# Altium PCB OSSI-1 OBC.PcbDoc (part 1 of 2)
Units mil, origin at the board's own origin, x right, y up, seen from the top; angles counter-clockwise.
Board outline 3701 x 3701 mil, 2 copper layers (Top, Bottom), stack 61.811 mil thick; 158 components, 161 nets, 616 pads, 177 vias.
Unrouted connection lines stored in the file: 1.
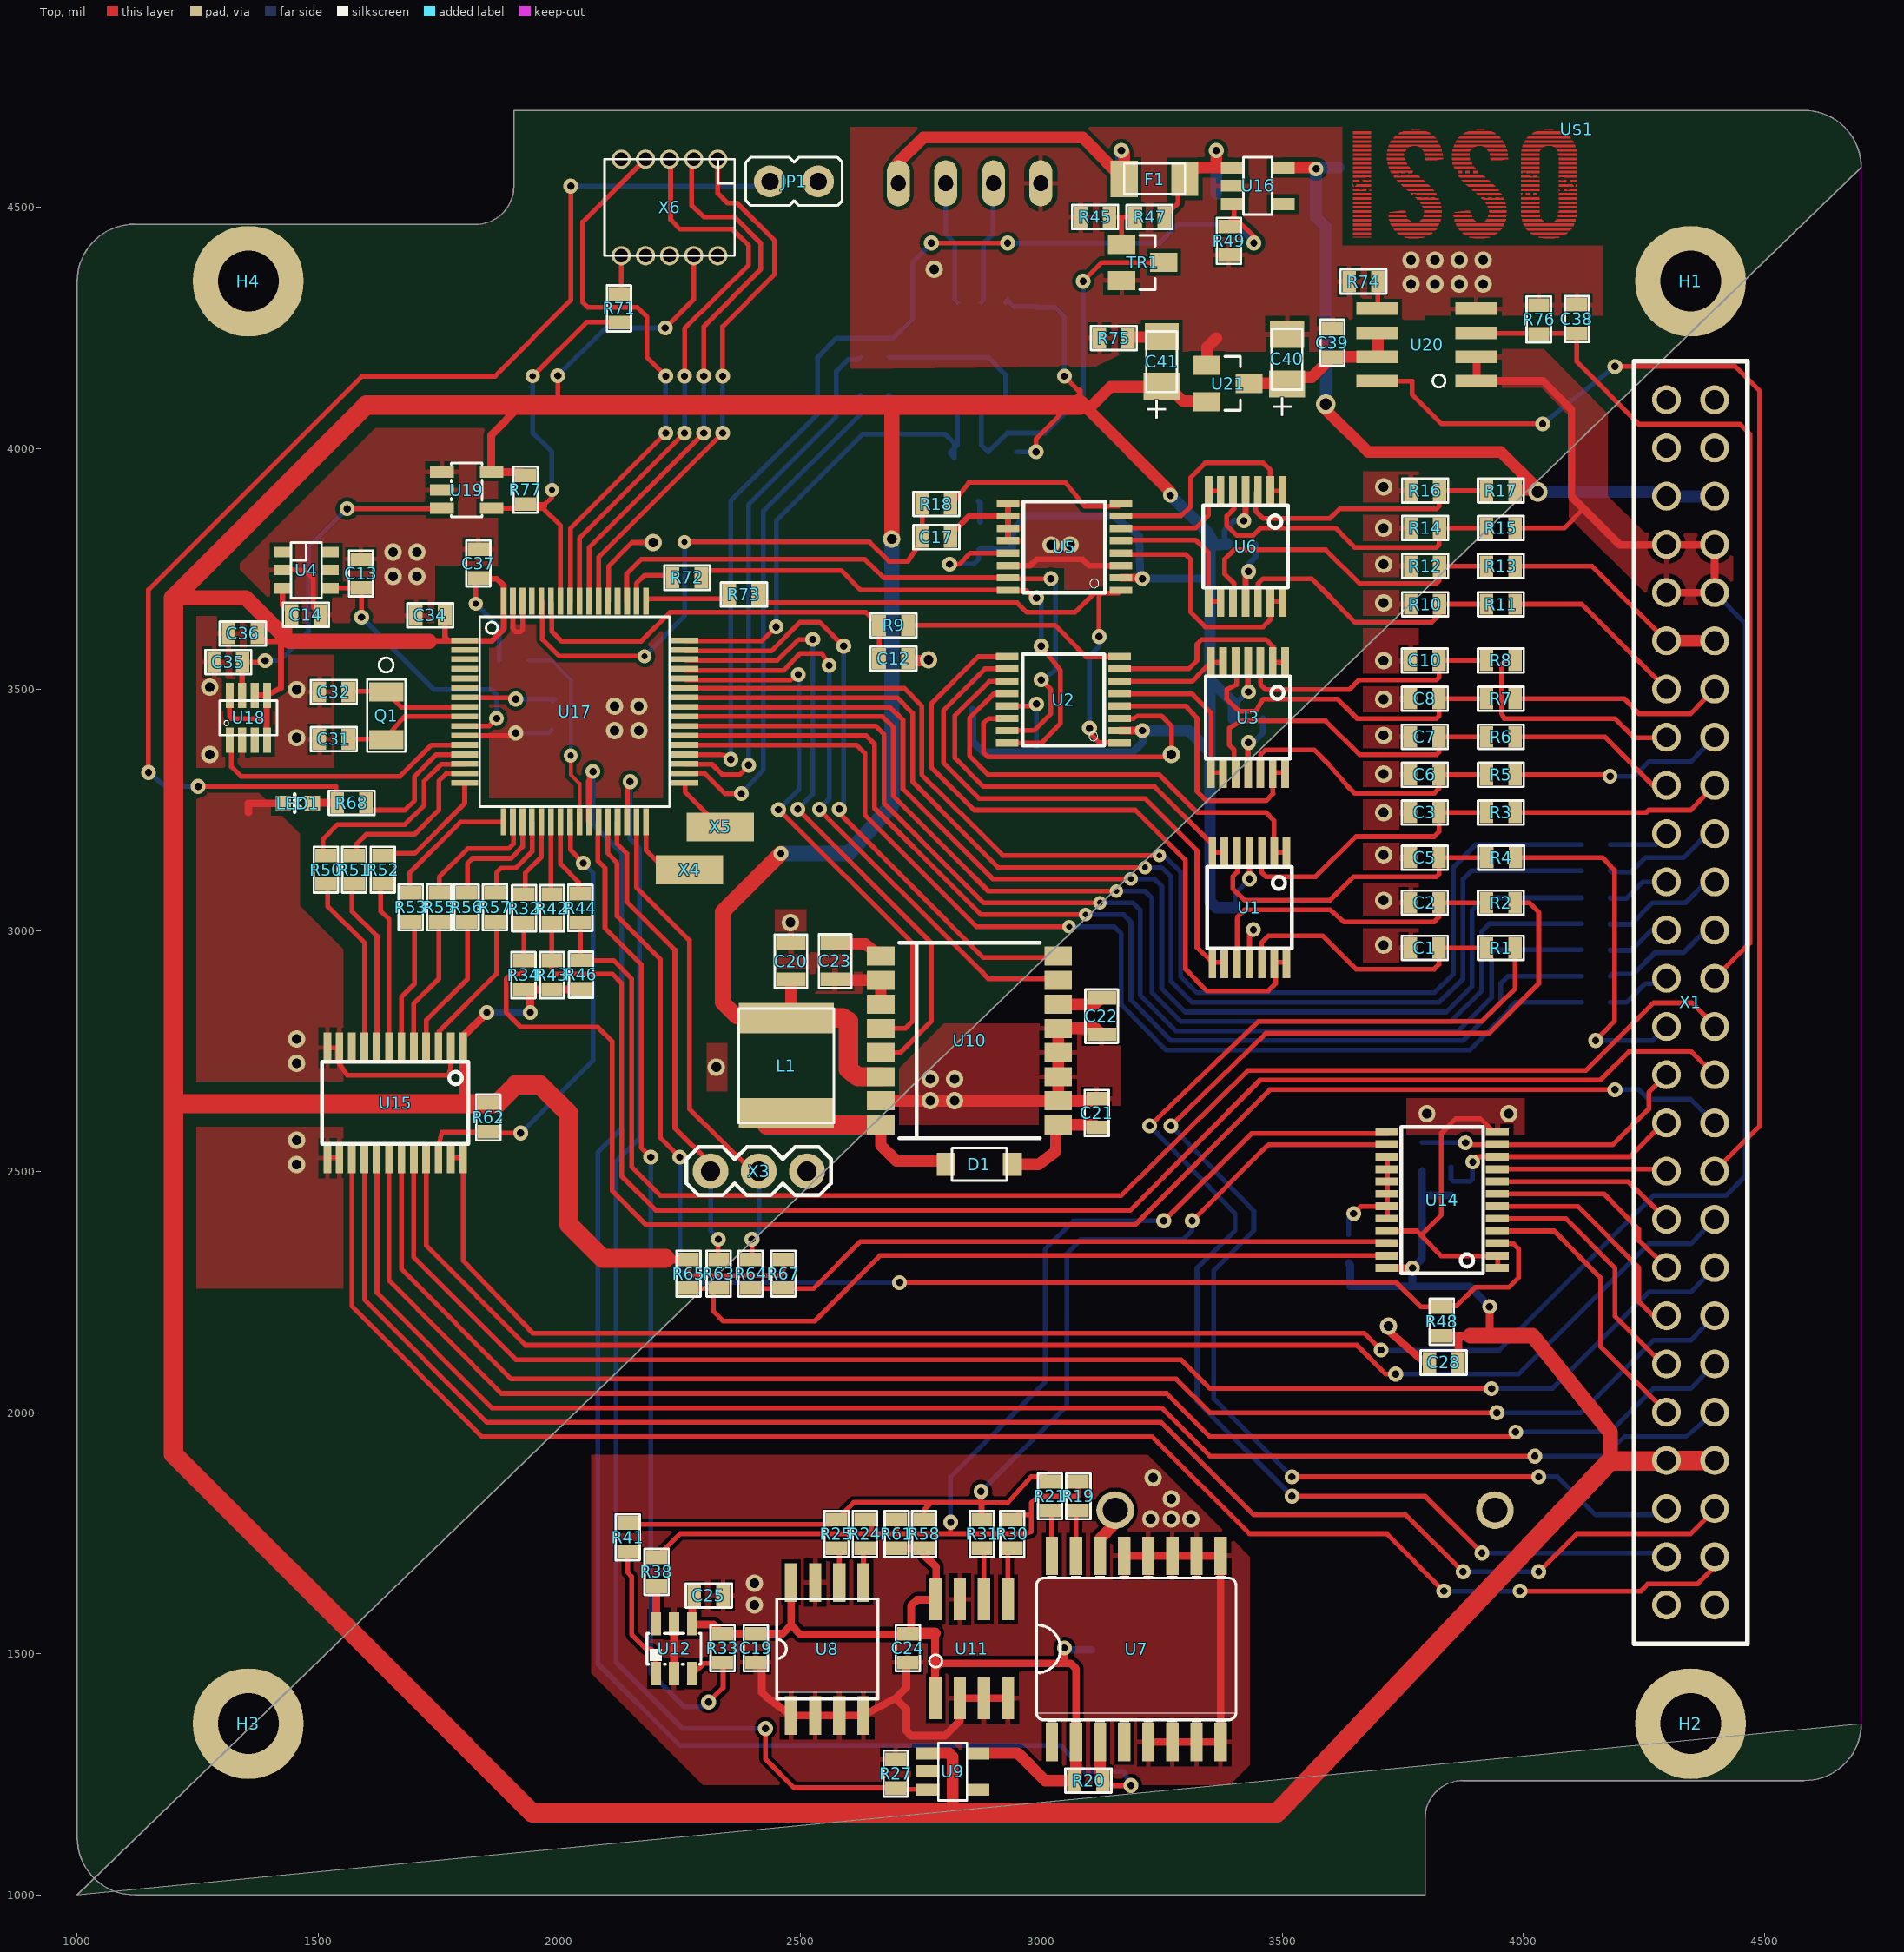
[diagram p0: Top view]
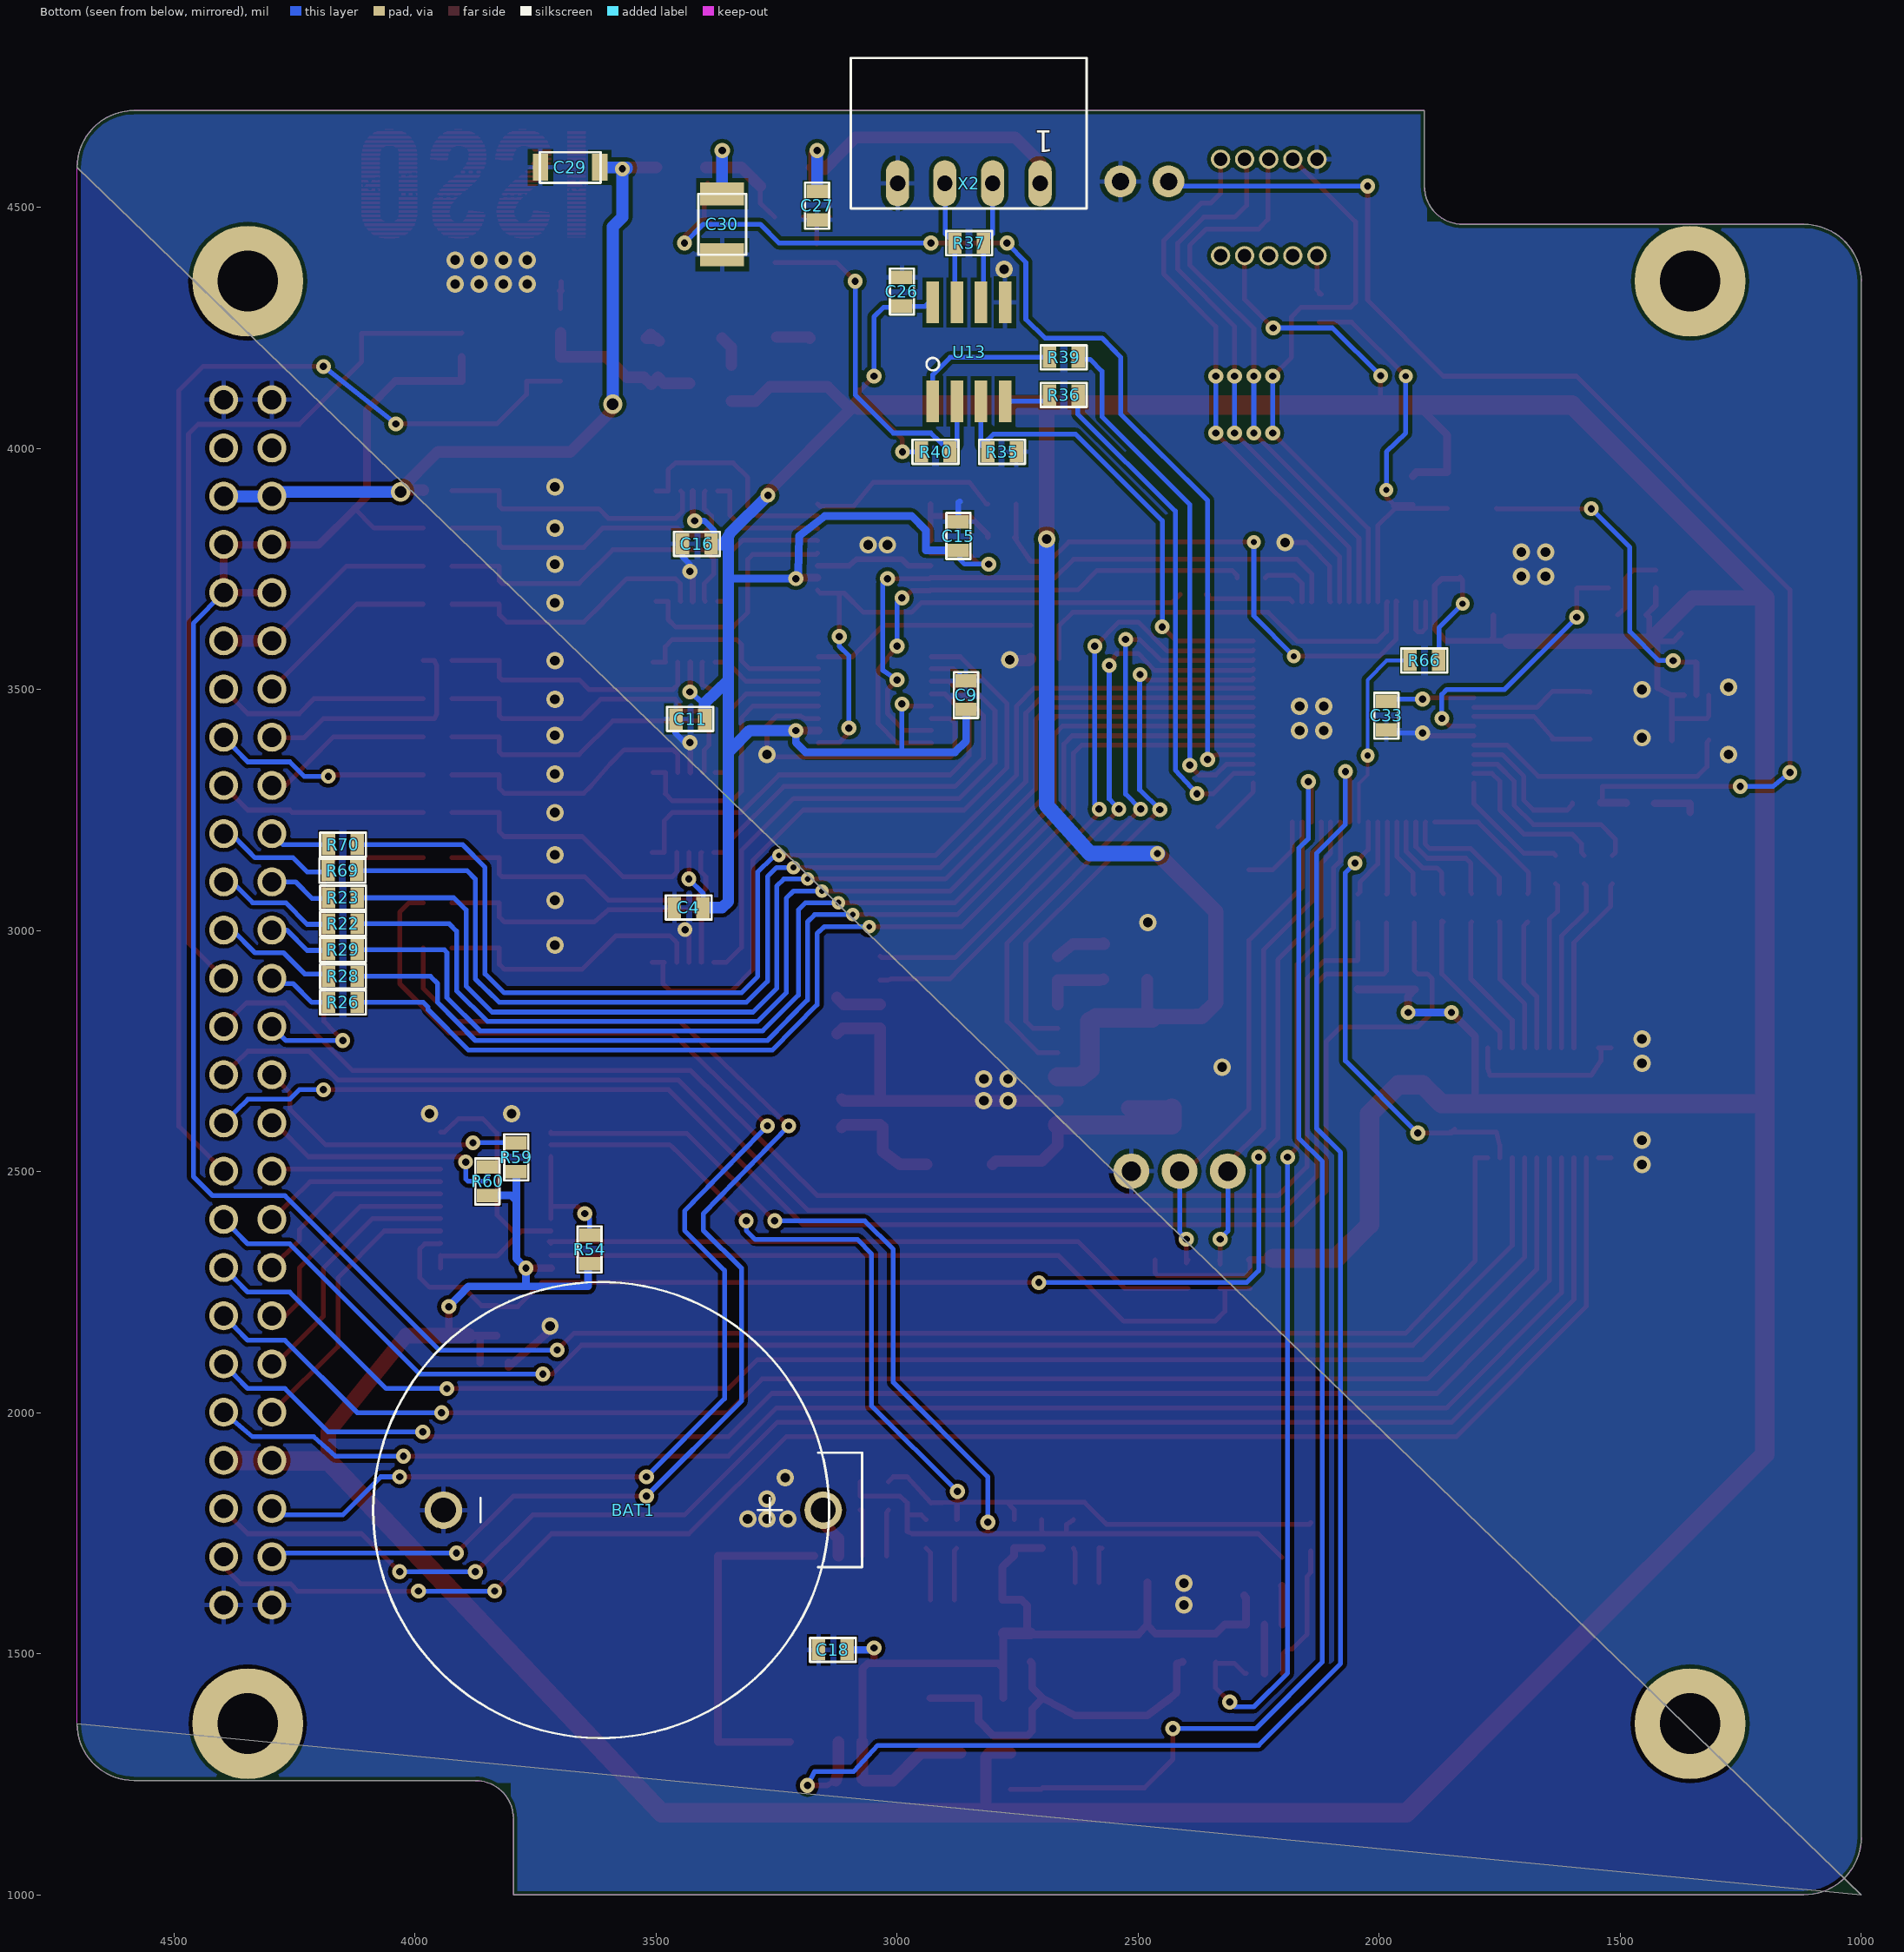
[diagram p1: Bottom view, seen from below]

## Layer stack, top to bottom
Top Solder: solder mask 0.4, Solder Resist, Dk 3.5
Top: signal copper 1.378
Dielectric 1: core 59.0551, FR-4, Dk 4.8
Bottom: signal copper 1.378
Bottom Solder: solder mask 0.4, Solder Resist, Dk 3.5

## Board outline
4701,1355 cw(c4583,1355) 4583,1237 3875,1237 ccw(c3875,1158) 3796,1158 3796,1000 1119,1000 cw(c1119,1119) 1000,1119 1000,4347 cw(c1118.5,4346.5) 1119,4465 1827,4465 ccw(c1827,4544) 1906,4544 1906,4701 4583,4701 cw(c4583,4583) 4701,4583 1000,1000

## Design rules (kind name [scope] priority, off if disabled: settings)
Clearance mdViaVia [IsVia vs IsVia] p1: gap=8
Clearance mdPadVia [IsPad vs IsVia] p2: gap=8
Clearance mdPadPad [IsPad vs IsPad] p3: gap=4
Clearance mdWireVia [(InLayerClass('Signal Layers') AND IsTrack) vs IsVia] p4: gap=8
Clearance mdWirePad [(InLayerClass('Signal Layers') AND IsTrack) vs IsPad] p5: gap=8
Clearance mdWireWire [(InLayerClass('Signal Layers') AND IsTrack) vs (InLayerClass('Signal Layers') AND IsTrack)] p6: gap=8
Clearance [All] p7: gap=8
HoleSize [All] p1: absolutevalues=TRUE maxlimit=100000 minlimit=10 maxpercent=80.000 minpercent=20.000
HoleToHoleClearance [All] p1: gap=8 allowstackedmicrovias=TRUE
PolygonConnect ThermalVias [IsVia] p1: connectstyle=Direct reliefconductorwidth=10 reliefentries=4 polygonreliefangle="90 Angle" airgapwidth=10
PolygonConnect [All] p2: connectstyle=Relief reliefconductorwidth=10 reliefentries=4 polygonreliefangle="90 Angle" airgapwidth=10
RoutingVias [All] p1: holewidth=28 width=50 viastyle="Through Hole" minholewidth=28 minwidth=50 maxholewidth=28 maxwidth=50
SilkToSilkClearance [All] p1 off: silktosilkclearance=10
SilkToSolderMaskClearance [IsPad] p1 off: minsilkscreentomaskgap=10 clearancetoexposedcopper=TRUE
SolderMaskExpansion [All] p1: expansion=4
Width [All] p1: maxlimit=100000 minlimit=8 preferedwidth=10
26 further rules are at their usual default settings.

## Components (designator, comment, footprint, x,y, rotation, side; value= is the part's Value field where it differs from the comment)
BAT1 "" BH32T-C-G 3614,1798 r90 bottom
C1 "100nF" C0603(1608) 3796,2964 r180 top
C2 "100nF" C0603(1608) 3796,3058 r180 top
C3 "100nF" C0603(1608) 3796,3245 r180 top
C4 "100nF" C0603(1608) 3432,3048 r0 bottom
C5 "100nF" C0603(1608) 3796,3151 r180 top
C6 "100nF" C0603(1608) 3796,3323 r180 top
C7 "100nF" C0603(1608) 3796,3402 r180 top
C8 "100nF" C0603(1608) 3796,3481 r180 top
C9 "100nF" C0603(1608) 2857,3488 r90 bottom
C10 "100nF" C0603(1608) 3796,3560 r180 top
C11 "100nF" C0603(1608) 3429,3439 r0 bottom
C12 "100nF" C0603(1608) 2693,3564 r0 top
C13 "100nF" C0603(1608) 1589,3741 r270 top
C14 "100nF" C0603(1608) 1475,3655 r180 top
C15 "100nF" C0603(1608) 2873,3818 r90 bottom
C16 "100nF" C0603(1608) 3415,3802 r0 bottom
C17 "100nF" C0603(1608) 2782,3816 r0 top
C18 "100nF" C0603(1608) 3133,1508 r0 bottom
C19 "100nF" C0603(1608) 2408,1512 r270 top
C20 "1uF 0805" C0805(2012) 2481,2936 r90 top
C21 "100nF" C0603(1608) 3115,2622 r270 top
C22 "1uF 0805" C0805(2012) 3125,2823 r270 top
C23 "1uF 0805" C0805(2012) 2572,2937 r270 top
C24 "100nF" C0603(1608) 2723,1512 r270 top
C25 "100nF" C0603(1608) 2310,1621 r0 top
C26 "100nF" C0603(1608) 2990,4325 r90 bottom
C27 "100nF" C0603(1608) 3166,4504 r270 bottom
C28 "100nF" C0603(1608) 3835,2104 r180 top
C29 "4.7uF, 1210" C1206-GCM31 3678,4583 r0 bottom
C30 "10uF,3225" C1210-GCM32 3363,4465 r270 bottom
C31 "12.5pF" C0603(1608) 1533,3397 r180 top
C32 "12.5pF" C0603(1608) 1533,3495 r180 top
C33 "100nF" C0603(1608) 1985,3446 r270 bottom
C34 "100nF" C0603(1608) 1733,3654 r180 top
C35 "100nF" C0603(1608) 1314,3557 r180 top
C36 "100nF" C0603(1608) 1344,3616 r180 top
C37 "100nF" C0603(1608) 1832,3761 r90 top
C38 "1uF" C0603(1608) 4111,4268 r90 top
C39 "100nF" C0603(1608) 3604,4219 r90 top
C40 "10uF, LDO Tantal 16V" C1206(3216)-A 3510,4185 r90 top
C41 "10uF, LDO Tantal 16V" C1206(3216)-A 3250,4180 r90 top
D1 "MMSD4148T1G" SOD-123 2871,2515 r0 top
F1 "POLYSWITCH" NANOSMDC150FCT 3235,4559 r0 top
H1 "" 3.2-PAD-ROUND 4347,4347 r0 top
H2 "" 3.2-PAD-ROUND 4347,1355 r0 top
H3 "" 3.2-PAD-ROUND 1355,1355 r0 top
H4 "" 3.2-PAD-ROUND 1355,4347 r0 top
JP1 "" JP1 2487,4554 r90 top
L1 "470uH, 240mA" L(2220) 2471,2720 r270 top
LED1 "" LED-0603 1458,3264 r90 top
Q1 "NX-3215" NX-3215 1641,3446 r270 top
R1 "10k" R0603(1608) 3953,2964 r0 top
R2 "10k" R0603(1608) 3953,3058 r0 top
R3 "10k" R0603(1608) 3953,3245 r0 top
R4 "10k" R0603(1608) 3954,3151 r0 top
R5 "10k" R0603(1608) 3953,3323 r0 top
R6 "10k" R0603(1608) 3953,3402 r0 top
R7 "10k" R0603(1608) 3953,3481 r0 top
R8 "10k" R0603(1608) 3953,3560 r0 top
R9 "10k" R0603(1608) 2693,3633 r0 top
R10 "100k" R0603(1608) 3796,3677 r0 top
R11 "100k" R0603(1608) 3953,3677 r0 top
R12 "100k" R0603(1608) 3796,3756 r0 top
R13 "100k" R0603(1608) 3953,3756 r0 top
R14 "100k" R0603(1608) 3796,3835 r0 top
R15 "100k" R0603(1608) 3953,3835 r0 top
R16 "100k" R0603(1608) 3796,3913 r0 top
R17 "100k" R0603(1608) 3953,3913 r0 top
R18 "10k" R0603(1608) 2782,3885 r0 top
R19 "250" R0603(1608) 3077,1827 r270 top
R20 "470k" R0603(1608) 3098,1237 r180 top
R21 "250" R0603(1608) 3018,1827 r270 top
R22 "1.5k" R0603(1608) 4150,3014 r180 bottom
R23 "1.5k" R0603(1608) 4150,3068 r180 bottom
R24 "250" R0603(1608) 2634,1749 r270 top
R25 "250" R0603(1608) 2575,1749 r270 top
R26 "1.5k" R0603(1608) 4150,2851 r180 bottom
R27 "100k" R0603(1608) 2698,1251 r90 top
R28 "1.5k" R0603(1608) 4150,2905 r180 bottom
R29 "1.5k" R0603(1608) 4150,2960 r180 bottom
R30 "250" R0603(1608) 2940,1749 r270 top
R31 "250" R0603(1608) 2877,1749 r270 top
R32 "4.7k" R0603(1608) 1927,3046 r90 top
R33 "470k" R0603(1608) 2339,1512 r270 top
R34 "470k" R0603(1608) 1926,2908 r270 top
R35 "33k" R0603(1608) 2782,3993 r0 bottom
R36 "4.7k" R0603(1608) 2654,4111 r0 bottom
R37 "120, DNP" R0603(1608) 2851,4426 r180 bottom
R38 "250" R0603(1608) 2202,1670 r270 top
R39 "4.7k" R0603(1608) 2654,4189 r0 bottom
R40 "33k" R0603(1608) 2920,3993 r0 bottom
R41 "250" R0603(1608) 2142,1742 r270 top
R42 "4.7k" R0603(1608) 1985,3046 r90 top
R43 "470k" R0603(1608) 1985,2908 r270 top
R44 "4.7k" R0603(1608) 2044,3047 r90 top
R45 "100k" R0603(1608) 3112,4480 r180 top
R46 "470k" R0603(1608) 2045,2909 r270 top
R47 "100k" R0603(1608) 3225,4480 r180 top
R48 "100k" R0603(1608) 3831,2189 r270 top
R49 "100k" R0603(1608) 3389,4431 r270 top
R50 "1.5k" R0603(1608) 1516,3126 r90 top
R51 "1.5k" R0603(1608) 1575,3126 r90 top
R52 "1.5k" R0603(1608) 1634,3126 r90 top
R53 "1.5k" R0603(1608) 1692,3048 r90 top
R54 "10k" R0603(1608) 3638,2339 r270 bottom
R55 "1.5k" R0603(1608) 1751,3048 r90 top
R56 "1.5k" R0603(1608) 1808,3048 r90 top
R57 "1.5k" R0603(1608) 1867,3048 r90 top
R58 "10k" R0603(1608) 2757,1749 r270 top
R59 "10k" R0603(1608) 3790,2530 r270 bottom
R60 "10k" R0603(1608) 3850,2480 r270 bottom
R61 "10k" R0603(1608) 2700,1749 r270 top
R62 "100k" R0603(1608) 1853,2612 r90 top
R63 "250" R0603(1608) 2331,2288 r90 top
R64 "250" R0603(1608) 2397,2288 r90 top
R65 "10k" R0603(1608) 2268,2288 r90 top
R66 "300k" R0603(1608) 1906,3560 r0 bottom
R67 "10k" R0603(1608) 2465,2288 r90 top
R68 "4.7k" R0603(1608) 1569,3265 r0 top
R69 "4.7k" R0603(1608) 4151,3124 r180 bottom
R70 "4.7k" R0603(1608) 4150,3178 r180 bottom
R71 "4.7k" R0603(1608) 2124,4291 r270 top
R72 "0" R0603(1608) 2265,3732 r0 top
R73 "0" R0603(1608) 2383,3697 r0 top
R74 "6.2k" R0603(1608) 3668,4346 r0 top
R75 "0" R0603(1608) 3151,4229 r180 top
R76 "100k" R0603(1608) 4032,4268 r270 top
R77 "100k" R0603(1608) 1930,3914 r90 top
TR1 "FDV301N" SOT23 3210,4386 r270 top
U1 "OPA4347" TSSOP14-PW 3432,3048 r180 top
U2 "ADG708" TSSOP16-RU 3046,3479 r180 top
U3 "OPA4347" TSSOP14-PW 3429,3442 r180 top
U4 "ADR121" TSOT-6UJ-6 1475,3748 r270 top
U5 "ADG708" TSSOP16-RU 3048,3796 r180 top
U6 "OPA4347" TSSOP14-PW 3424,3797 r180 top
U7 "DS3231-L" SO16L 3197,1510 r0 top
U8 "24LC256-8LEAD" SO08-208 2556,1510 r0 top
U9 "LTC4411" TSOT23-5 2816,1256 r270 top
U10 "ADXRS450SOIC" SOIC-16CAV 2851,2772 r270 top
U11 "FM24V02-G" SO8 2856,1510 r0 top
U12 "TMP101" SOT23-6DBV 2238,1510 r0 top
U13 "SN65HVD11QD" SO8 2851,4200 r180 bottom
U14 "TCA9548APWR" TSSOP-24-PW 3832,2441 r90 top
U15 "SN74LVC8T245PWR" PW_R-PDSO-G24 1660,2643 r180 top
U16 "LTC4411" TSOT23-5 3449,4545 r270 top
U17 "MSP430F1611" PM/PAG64 2032,3454 r0 top
U18 "MAX6369" SOT23-8 1355,3441 r0 top
U19 "TPS3838" SOT23-5DBV 1808,3914 r270 top
U20 "MAX890L" SO8 3800,4215 r90 top
U21 "MCP1700_SOT23" SOT23 3387,4135 r270 top
U$1 "" OSSILOGORECT1005 4111,4662 r180 top
X1 "ESQ-126-38-G-D" ESQ-126-XX-X-D 4347,2851 r0 top
X2 "MOLEX-22-05-7045" 22-05-7045 2851,4550 r0 bottom
X3 "" 1X03 2314,2501 r0 top
X4 "P-PAD-S" P-PAD-S 2270,3126 r180 top
X5 "P-PAD-S" P-PAD-S 2334,3215 r180 top
X6 "JTAG10PINMINI-H" M50-3200545 2229,4500 r180 top

## Footprints (in the part's own frame and the unit in brackets; to place one, negate y for a bottom-side part, rotate by r counter-clockwise, add the part's x,y. Pads: shape width x height; smd on the part's side, far side on the other; paste and mask are expansions set on the pad)
1X03 [mil] "1X03"
  round 74 hole 40: 1(0,0) 2(100,0) 3(200,0)
  silkscreen extent -50,-50 250,50
3.2-PAD-ROUND [mil] "3.2-PAD-ROUND"
  round 230 hole 126: B3,2(0,0)
22-05-7045 [mil] "22-05-7045"
  oval 48x96 hole 32: 1(-147.64,0) 2(-49.21,0) 3(50,0) 4(148,0)
  silkscreen extent -244,-260 245,52
BH32T-C-G [mil] "BH32T-C-G"
  round 78 hole 52: N(0,327) P(0,-460.63)
  silkscreen extent -473,-541 473,473
C0603(1608) [mil] "C0603(1608)"
  rect 28x44 smd: 1(-29.53,0) 2(30,0)
  silkscreen extent -47,-25 48,25
C0805(2012) [mil] "C0805(2012)"
  rect 28x60 smd: 1(-37.4,0) 2(38,0)
  silkscreen extent -55,-33 56,34
C1206(3216)-A [mil] "C1206(3216)-A"
  rect 56x75 smd: 1(-51.18,0)
  rect 56x71 smd: 2(52,0)
  silkscreen extent -63,-31 63,32
C1206-GCM31 [mil] "C1206-GCM31"
  rect 32x56 smd: P$1(-61.02,0) P$2(62,0)
  silkscreen extent -63,-31 63,32
C1210-GCM32 [mil] "C1210-GCM32"
  rect 48x91 smd: P$1(-62.99,0) P$2(63,0)
  silkscreen extent -63,-49 63,50
ESQ-126-XX-X-D [mil] "ESQ-126-XX-X-D"
  round 60 hole 40: 1(-50,1250) 2(50,1250) 3(-50,1150) 4(50,1150) 5(-50,1050) 6(50,1050) 7(-50,950) 8(50,950) 9(-50,850) 10(50,850) 11(-50,750) 12(50,750) 13(-50,650) 14(50,650) 15(-50,550) 16(50,550) 17(-50,450) 18(50,450) 19(-50,350) 20(50,350) 21(-50,250) 22(50,250) 23(-50,150) 24(50,150) 25(-50,50) 26(50,50) 27(-50,-50) 28(50,-50) 29(-50,-150) 30(50,-150) 31(-50,-250) 32(50,-250) 33(-50,-350) 34(50,-350) 35(-50,-450) 36(50,-450) 37(-50,-550) 38(50,-550) 39(-50,-650) 40(50,-650) 41(-50,-750) 42(50,-750) 43(-50,-850) 44(50,-850) 45(-50,-950) 46(50,-950) 47(-50,-1050) 48(50,-1050) 49(-50,-1150) 50(50,-1150) 51(-50,-1250) 52(50,-1250)
  silkscreen extent -117,-1330 118,1330
JP1 [mil] "JP1"
  round 66 hole 36: 1(0,-50) 2(0,50)
  silkscreen extent -50,-100 50,100
L(2220) [mil] "L(2220)"
  rect 63x197 smd: P$1(-98.43,0) P$2(99,0)
  silkscreen extent -118,-98 119,99
LED-0603 [mil] "LED-0603"
  rect 32x32 smd: A(0,-29.53) C(0,30)
  silkscreen extent -18,-6 19,7
M50-3200545 [mil] "M50-3200545"
  round 40 hole 28: 1(-100,-100) 2(-100,100) 3(-50,-100) 4(-50,100) 5(0,-100) 6(0,100) 7(50,-100) 8(50,100) 9(100,-100) 10(100,100)
  silkscreen extent -135,-100 135,100
NANOSMDC150FCT [mil] "NANOSMDC150FCT"
  rect 56x75 smd: 1(-62.99,0)
  rect 56x71 smd: 2(63,0)
  silkscreen extent -63,-31 63,32
NX-3215 [mil] "NX-3215"
  rect 40x71 smd: 1(-49.21,0) 2(50,0)
  silkscreen extent -120,-39 75,40
OSSILOGORECT1005 [mil] "OSSILOGORECT1005"
  Top drawing of 1356 lines, arcs and shapes, not listed
P-PAD-S [mil] "P-PAD-S"
  rect 140x60 smd: 1(0,0)
PM/PAG64 [mil] "PM/PAG64"
  rect 56x12 smd: 1(-228.35,148) 2(-228.35,128) 3(-228.35,109) 4(-228.35,89) 5(-228.35,69) 6(-228.35,50) 7(-228.35,30) 8(-228.35,10) 9(-228.35,-9.84) 10(-228.35,-29.53) 11(-228.35,-49.21) 12(-228.35,-68.9) 13(-228.35,-88.58) 14(-228.35,-108.27) 15(-228.35,-127.95) 16(-228.35,-147.64) 33(229,-147.64) 34(229,-127.95) 35(229,-108.27) 36(229,-88.58) 37(229,-68.9) 38(229,-49.21) 39(229,-29.53) 40(229,-9.84) 41(229,10) 42(229,30) 43(229,50) 44(229,69) 45(229,89) 46(229,109) 47(229,128) 48(229,148)
  rect 12x56 smd: 17(-147.64,-228.35) 18(-127.95,-228.35) 19(-108.27,-228.35) 20(-88.58,-228.35) 21(-68.9,-228.35) 22(-49.21,-228.35) 23(-29.53,-228.35) 24(-9.84,-228.35) 25(10,-228.35) 26(30,-228.35) 27(50,-228.35) 28(69,-228.35) 29(89,-228.35) 30(109,-228.35) 31(128,-228.35) 32(148,-228.35) 49(148,229) 50(128,229) 51(109,229) 52(89,229) 53(69,229) 54(50,229) 55(30,229) 56(10,229) 57(-9.84,229) 58(-29.53,229) 59(-49.21,229) 60(-68.9,229) 61(-88.58,229) 62(-108.27,229) 63(-127.95,229) 64(-147.64,229)
  silkscreen extent -197,-197 197,197
PW_R-PDSO-G24 [mil] "PW_R-PDSO-G24"
  rect 16x63 smd: 1(-140.75,-114.17) 2(-115.16,-114.17) 3(-89.57,-114.17) 4(-63.98,-114.17) 5(-38.39,-114.17) 6(-12.8,-114.17) 7(13,-114.17) 8(39,-114.17) 9(64,-114.17) 10(90,-114.17) 11(116,-114.17) 12(141,-114.17) 13(141,115) 14(116,115) 15(90,115) 16(64,115) 17(39,115) 18(13,115) 19(-12.8,115) 20(-38.39,115) 21(-63.98,115) 22(-89.57,115) 23(-115.16,115) 24(-140.75,115)
  silkscreen extent -152,-85 152,85
R0603(1608) [mil] "R0603(1608)"
  rect 28x44 smd: 1(-29.53,0) 2(30,0)
  silkscreen extent -47,-25 48,25
SO8 [mil] "SO8"
  rect 26x87 smd: 1(-75,-102.36) 2(-25,-102.36) 3(25,-102.36) 4(75,-102.36) 5(75,103) 6(25,103) 7(-25,103) 8(-75,103)
  silkscreen extent -88,-38 -62,-12
SO08-208 [mil] "SO08-208"
  rect 26x80 smd: 1(-75,-137.73) 2(-25,-137.73) 3(25,-137.73) 4(75,-137.73) 5(75,138) 6(25,138) 7(-25,138) 8(-75,138)
  silkscreen extent -105,-104 105,104
SO16L [mil] "SO16L"
  rect 26x80 smd: 1(-175,-193) 2(-125,-193) 3(-75,-193) 4(-25,-193) 5(25,-193) 6(75,-193) 7(125,-193) 8(175,-193) 9(175,193) 10(125,193) 11(75,193) 12(25,193) 13(-25,193) 14(-75,193) 15(-125,193) 16(-175,193)
  silkscreen extent -207,-152 207,152
SOD-123 [mil] "SOD-123"
  rect 39x48 smd: A(-68.31,0) C(69,0)
  silkscreen extent -56,-33 57,34
SOIC-16CAV [mil] "SOIC-16CAV"
  rect 40x57 smd: 1(-175,-183.86) 2(-125,-183.86) 3(-75,-183.86) 4(-25,-183.86) 5(25,-183.86) 6(75,-183.86) 7(125,-183.86) 8(175,-183.86) 9(175,184) 10(125,184) 11(75,184) 12(25,184) 13(-25,184) 14(-75,184) 15(-125,184) 16(-175,184)
  silkscreen extent -202,-146 203,146
SOT23 [mil] "SOT23"
  rect 40x56 smd: 1(-37.4,-43.31) 2(38,-43.31) 3(0,44)
  silkscreen extent -56,-6 56,26
SOT23-5DBV [mil] "SOT23-5DBV"
  rect 24x49 smd: 1(-37.4,-51.18) 2(0,-51.18) 3(38,-51.18) 4(38,52) 5(-37.4,52)
  silkscreen extent -56,-32 56,32
SOT23-6DBV [mil] "SOT23-6DBV"
  rect 22x48 smd: 1(-37.4,-51.18) 2(0,-51.18) 3(38,-51.18) 4(38,52) 5(0,52) 6(-37.4,52)
  silkscreen extent -56,-32 56,32
SOT23-8 [mil] "SOT23-8"
  rect 17x52 smd: 1(-38.39,-46.26) 2(-12.8,-46.26) 3(13,-46.26) 4(39,-46.26) 5(39,47) 6(13,47) 7(-12.8,47) 8(-38.39,47)
  silkscreen extent -59,-35 60,36
TSOT23-5 [mil] "TSOT23-5"
  rect 25x49 smd: P$1(-37.4,-51.57) P$2(0,-51.57) P$3(38,-51.57) P$4(38,52) P$5(-37.4,52)
  silkscreen extent -59,-30 60,30
TSOT-6UJ-6 [mil] "TSOT-6UJ-6"
  rect 22x36 smd: 1(-37.4,-49.21) 2(0,-49.21) 3(38,-49.21) 4(38,50) 5(0,50) 6(-37.4,50)
  silkscreen extent -57,-31 58,32
TSSOP14-PW [mil] "TSSOP14-PW"
  rect 16x63 smd: 1(-76.77,-114.17) 2(-51.18,-114.17) 3(-25.59,-114.17) 4(0,-114.17) 5(26,-114.17) 6(52,-114.17) 7(77,-114.17) 8(77,115) 9(52,115) 10(26,115) 11(0,115) 12(-25.59,115) 13(-51.18,115) 14(-76.77,115)
  silkscreen extent -88,-85 88,85
TSSOP16-RU [mil] "TSSOP16-RU"
  rect 47x15 smd: 1(-116.93,90) 2(-116.93,64) 3(-116.93,39) 4(-116.93,13) 5(-116.93,-12.8) 6(-116.93,-38.39) 7(-116.93,-63.98) 8(-116.93,-89.57) 9(117,-89.57) 10(117,-63.98) 11(117,-38.39) 12(117,-12.8) 13(117,13) 14(117,39) 15(117,64) 16(117,90)
  silkscreen extent -85,-94 85,95
TSSOP-24-PW [mil] "TSSOP-24-PW"
  rect 16x48 smd: 1(-140.75,-114.17) 2(-115.16,-114.17) 3(-89.57,-114.17) 4(-63.98,-114.17) 5(-38.39,-114.17) 6(-12.8,-114.17) 7(13,-114.17) 8(39,-114.17) 9(64,-114.17) 10(90,-114.17) 11(116,-114.17) 12(141,-114.17) 13(141,115) 14(116,115) 15(90,115) 16(64,115) 17(39,115) 18(13,115) 19(-12.8,115) 20(-38.39,115) 21(-63.98,115) 22(-89.57,115) 23(-115.16,115) 24(-140.75,115)
  silkscreen extent -152,-85 152,85

## Part data
BAT1: library part BH32T-C-G
C1 C2 C3 C4 C5 C6 C7 C8 C9 C10 C11 C12 C13 C14 C15 C16 C17 C18 C19 C21 C24 C25 C26 C27 C28 C31 C32 C33 C34 C35 C36 C37 C38 C39: library part C0603(1608)
C20 C22 C23: library part C0805(2012)
C29: library part C1206-GCM31
C30: library part C1210-GCM32
C40 C41: library part C1206(3216)-A
D1: library part SOD-123
F1: library part NANOSMDC150FCT
H1 H2 H3 H4: library part 3.2-PAD-ROUND
JP1: library part JP1
L1: library part L(2220)
LED1: library part LED-0603
R1 R2 R3 R4 R5 R6 R7 R8 R9 R10 R11 R12 R13 R14 R15 R16 R17 R18 R19 R20 R21 R22 R23 R24 R25 R26 R27 R28 R29 R30 R31 R32 R33 R34 R35 R36 R37 R38 R39 R40 R41 R42 R43 R44 R45 R46 R47 R48 R49 R50 R51 R52 R53 R54 R55 R56 R57 R58 R59 R60 R61 R62 R63 R64 R65 R66 R67 R68 R69 R70 R71 R72 R73 R74 R75 R76 R77: library part R0603(1608)
TR1 U21: library part SOT23
U1 U3 U6: library part TSSOP14-PW
U2 U5: library part TSSOP16-RU
U4: library part TSOT-6UJ-6
U7: library part SO16L
U8: library part SO08-208
U9 U16: library part TSOT23-5
U10: library part SOIC-16CAV
U11 U13 U20: library part SO8
U12: library part SOT23-6DBV
U14: library part TSSOP-24-PW
U15: library part PW_R-PDSO-G24
U17: library part PM/PAG64
U18: library part SOT23-8
U19: library part SOT23-5DBV
U$1: library part OSSILOGORECT1005
X1: library part ESQ-126-XX-X-D
X2: library part 22-05-7045
X3: library part 1X03
X6: library part M50-3200545

## Via types
v1: diameter 31/31 (per signal layer), hole 15, Top to Bottom, 101 vias
v2: diameter 36/36 (per signal layer), hole 20, Top to Bottom, 59 vias
v3: diameter 28/28 (per signal layer), hole 12, Top to Bottom, 7 vias
v4: diameter 29/29 (per signal layer), hole 13, Top to Bottom, 6 vias
v5: diameter 40/40 (per signal layer), hole 24, Top to Bottom, 2 vias
v6: diameter 32/32 (per signal layer), hole 16, Top to Bottom, 2 vias

## Nets (pads, with @x,y where several pads share a name; then routed paths per layer and width w, separated by ;. In a path a pad name is that pad's centre, name@x,y a point inside that pad or via, vN(x,y) a via of type N, cw(c..) or ccw(c..) an arc to the next point about the centre after c; other vN are vias at no path point)
3.3VOBC: C4.1 C9.1 C11.1 C14.2 C15.1 C16.1 C20.1 C26.1 C28.1 C34.1 C36.1 C37.1 C41.1 L1.P$1 R34.2 R40.2 R43.2 R46.2 R48.2 R54.2 R59.2 R60.2 R62.2 R65.2 R66.1 R67.2 R77.2 U1.4 U2.2 U2.13 U3.4 U4.3 U5.2 U5.13 U6.4 U9.P$1 U10.6 U13.8 U14.24 U15.1 U17.1 U17.64 U18.4 U18.5 U18.6 U18.8 U19.5 U21.2 X1.45 X1.46 X6.4 | length 20497.1
  Top w10: U18.8@1316,3488 1316,3445 1320,3440 1393,3440 ; v4(1827,3678) 1827,3717 1827,3727 C37.1@1832,3732 ; 1921,4090 2090,4090 ; v1(1997,4151) 1997,4096 2080,4090 ; v1(2220,4250) 2279,4309 X6.4@2279,4400 ; R65.2@2268,2317 2268,2293 2275,2285 2460,2285 2465,2290 R67.2@2465,2317 ; v1(2810,3760) 2830,3760 2853,3783 U5.13@2931,3783 ; U2.13@2929,3466 2976,3466 v1(2990,3470) ; v1(2989,3993) 2989,4019 3080,4111 ; v1(3048,4150) 3080,4117 3080,4121 ; v1(3432,3107) U1.4@3432,3162
  Top w12: U18.6@1368,3488 U18.5@1393,3488 ; C36.1@1374,3616 1389,3600 1430,3600 ; U18.4@1393,3395 1393,3440 U18.5@1393,3488 ; U4.3@1426,3711 1426,3675 1446,3655 1440,3650 1440,3600 1430,3600 ; 1730,3600 1731,3601 1770,3601 ; C34.1@1763,3654 1763,3609 1770,3601 ; C37.1@1832,3732 1834,3730 1870,3730 1885,3716 1885,3682 1885,3626 1880,3620 1861,3601 1804,3601 1770,3601 ; 3080,4090 3080,4100 3080,4111 3080,4117 3080,4121 ; v1(3420,3850) 3424,3864 U6.4@3424,3912 ; U3.4@3429,3557 3429,3502 v1(3430,3495) ; U18.5@1393,3488 1423,3503 1423,3593 1430,3600
  Top w16: v1(1850,2830) 1801,2781 1801,2757 1801,2650 1810,2640 1840,2640 1841,2641 R62.2@1853,2641 ; 1921,4090 1859,4028 1859,3951 1923,3951 R77.2@1930,3943 ; v1(1940,2830) 1940,2864 R34.2@1926,2878 R43.2@1985,2878 2044,2878 R46.2@2045,2879 ; 2220,2320 2224,2317 R65.2@2268,2317 ; 3160,1181 3170,1170 ; U2.2@3163,3415 v1(3210,3415) ; U5.2@3165,3732 3209,3732 v1(3210,3730) ; U14.24@3718,2300 v1(3770,2300) ; R48.2@3831,2160 3870,2160 ; C28.1@3865,2104 3865,2154 3870,2160 ; 3890,2160 3870,2160 ; 3930,2160 v1(3930,2220) ; X1.45@4297,1900 X1.45@4297,1901
  Top w24: 1200,2640 1210,2640 1211,2641 ; 1675,1439 1681,1434 ; L1.P$1@2471,2819 2508,2822 2460,2822 2481,2821 C20.1@2481,2898 ; U9.P$1@2765,1294 2809,1294 2816,1286 2816,1170 ; 3077,4101 3082,4096 ; 3080,4100 3080,4098 3082,4096 ; v1(3268,3903) 3268,3910 3097,4081 ; U21.2@3344,4098 3294,4098 3264,4128 3250,4128 3144,4128 3097,4081 ; 2816,1170 2816,1168 2816,1170 ; 3082,4096 3097,4081
  Top w32: 1200,3690 1350,3690 1440,3600 1730,3600 ; v1(2460,3160) 2339,3039 2339,2851 2368,2822 2380,2822 2490,2821 L1.P$1@2481,2821 ; v2(2690,3812) 2690,4090 ; 3890,2160 3930,2160 4019,2160 4180,1960 4180,1900
  Top w40: 1211,2641 1853,2641 1871,2641 1910,2680 1960,2680 2020,2620 2020,2390 2090,2320 2220,2320 ; L1.P$1@2471,2819 2588,2819 2600,2812 2600,2712 2620,2697 U10.6@2667,2697 ; 3080,4090 2690,4090 2090,4090 2080,4090 1921,4090 1600,4090 1200,3690 1200,2640 1200,1914 1675,1439 1944,1170 2816,1170 3170,1170 3489,1170 4180,1900 X1.45@4297,1900 ; X1.45@4297,1901 X1.46@4397,1901
  Bottom w10: v4(1827,3678) 1876,3628 R66.1@1876,3560 ; v1(1997,4151) 2097,4250 v1(2220,4250) ; v1(2810,3760) 2860,3760 2870,3770 2870,3790 2872,3789 C15.1@2873,3789 ; U13.8@2926,4303 2926,4304 2930,4308 2942,4295 2990,4295 2989,4294 2989,4293 3028,4293 3048,4273 v1(3048,4150) ; R40.2@2949,3993 v1(2989,3993) ; 2990,3370 v1(2990,3470) ; C4.1@3402,3048 3402,3077 v1(3432,3107)
  Bottom w12: 3350,3520 3400,3470 v1(3430,3495) ; C16.1@3386,3802 3382,3802 3380,3800 3380,3830 3400,3850 v1(3420,3850)
  Bottom w16: v1(1850,2830) v1(1940,2830) ; C9.1@2857,3458 2857,3393 2880,3370 2990,3370 3190,3370 3210,3390 v1(3210,3415) ; C15.1@2873,3789 2940,3789 2940,3830 2970,3860 3150,3860 3203,3819 3205,3742 3209,3732 v1(3210,3730) 3350,3730 ; 3345,3375 3350,3380 ; R54.2@3638,2310 3641,2306 3641,2262 3771,2262 ; R59.2@3790,2501 3790,2440 ; R60.2@3850,2451 3801,2451 3790,2440 ; v1(3930,2220) 3889,2262 3771,2262 ; 3771,2262 3770,2272 v1(3770,2300) 3790,2320 3790,2440
  Bottom w24: v1(3210,3415) 3306,3415 3345,3375 ; v1(3268,3903) 3346,3825 3360,3800 ; C16.1@3386,3802 3360,3800 ; C11.1@3399,3439 3399,3472 3350,3520 ; C4.1@3402,3048 3363,3048 3350,3060 3350,3310 3350,3380 3350,3520 ; 3350,3520 3350,3730 3350,3815 3360,3800
  Bottom w32: v1(2460,3160) 2600,3160 2690,3260 v2(2690,3812)
3.3VOBC_I2C: C18.1 C19.1 C24.1 C25.1 R20.2 R33.1 R58.2 R61.2 U7.2 U8.8 U9.P$5 U11.1 U11.8 U12.4 | length 1968.1
  Top w8: R33.1@2339,1542 2340,1545 R33.1@2340,1542 ; C24.1@2722,1540 2725,1545 C24.1@2723,1542 ; U11.1@2780,1410 U11.1@2781,1408
  Top w16: C25.1@2280,1621 2280,1620 2276,1616 2276,1561 2320,1561 2339,1542 2340,1542 2408,1542 2464,1542 2481,1560 ; U8.8@2481,1648 2481,1560 ; R61.2@2700,1719 R58.2@2757,1719 2757,1704 2782,1680 2782,1613 2781,1612 2742,1612 2730,1600 2730,1549 C24.1@2723,1542 ; C24.1@2722,1540 2500,1540 2481,1560 ; 2779,1542 2780,1540 2780,1470 ; U11.1@2780,1408 2780,1410 2780,1470 ; v1(3048,1512) 3048,1483 3050,1480 ; U7.2@3072,1317 3072,1469 3061,1480 3050,1480 ; 2780,1470 2790,1480 3050,1480
  Top w24: C24.1@2723,1542 2779,1542 ; U9.P$5@2868,1294 2951,1294 3008,1237 R20.2@3068,1237 3072,1241 U7.2@3072,1317
  Bottom w16: v1(3048,1512) 3052,1508 C18.1@3104,1508
/RE: R40.1 TR1.3 U13.2 | length 774.5
  Top w10: v1(3087,4347) 3126,4386 TR1.3@3253,4386
  Bottom w10: U13.2@2876,4098 2876,4007 2890,3993 2930,4032 3008,4032 3087,4111 v1(3087,4347)
A: R37.2 U13.6 X2.2 | length 270.4
  Bottom w10: X2.2@2812,4541 2802,4550 2802,4445 R37.2@2821,4426 2821,4308 U13.6@2826,4303
ADC0: C12.1 R9.1 U17.59 | length 854.9
  Top w10: U17.59@1983,3682 1985,3680 1985,3620 2005,3600 2170,3600 2230,3660 2570,3660 2636,3660 2664,3633 C12.1@2664,3564
ADC1: C17.1 R18.1 U17.60 | length 1195
  Top w10: U17.60@1963,3682 1965,3684 1965,3604 2000,3569 v4(2177,3569) ; v4(2260,3806) 2575,3806 2644,3806 2684,3766 2723,3766 2757,3815 2752,3815 2753,3816 R18.1@2753,3885
  Bottom w10: v4(2177,3569) 2260,3653 v4(2260,3806)
ANT_DEPLOY1: R70.1 X1.19 | length 126.5
  Bottom w10: R70.1@4180,3178 4274,3178 X1.19@4297,3201
ANT_DEPLOY2: R69.1 X1.20 | length 250.3
  Bottom w10: R69.1@4180,3124 4183,3122 4224,3122 4253,3151 4332,3151 4347,3166 4382,3201 X1.20@4397,3201
B: R37.1 U13.7 X2.3 | length 270.7
  Bottom w10: U13.7@2876,4303 2880,4307 2880,4426 2900,4445 2900,4550 X2.3@2890,4541
BAT_-CHRG: U15.18 X1.42 | length 3202.3
  Top w10: U15.18@1647,2529 1647,2274 1880,2040 3260,2040 3350,1950 3974,1950 v1(3984,1960)
  Bottom w10: v1(3984,1960) 4180,1960 4270,2050 4347,2050 X1.42@4397,2101
BAT_-CHRG_IN: R53.2 U17.17 | length 282.3
  Top w10: R53.2@1692,3077 1690,3079 1690,3120 1795,3225 U17.17@1885,3225
BAT_-FAULT: U15.17 X1.44 | length 3229.7
  Top w10: U15.17@1622,2529 1622,2249 1860,2010 3250,2010 3350,1910 v1(4024,1910)
  Bottom w10: v1(4024,1910) 4165,1910 4210,1950 4337,1950 X1.44@4397,2001
BAT_-FAULT_IN: R52.2 U17.16 | length 256.7
  Top w10: R52.2@1634,3156 1638,3160 1700,3160 1804,3264 U17.16@1804,3306
BAT_-ON: U15.20 X1.38 | length 3122.6
  Top w10: U15.20@1698,2529 1698,2323 1910,2110 3290,2110 3350,2050 v1(3934,2050)
  Bottom w10: v1(3934,2050) 4060,2050 4260,2250 4347,2250 X1.38@4397,2301
BAT_-ON_IN: R56.2 U17.19 | length 242.7
  Top w10: R56.2@1808,3077 1810,3080 1810,3140 1820,3150 1900,3150 1924,3174 U17.19@1924,3225
BAT_TEMP: R2.2 X1.47 | length 2803.4
  Top w10: v1(3269,2595) 3466,2787 3929,2787 4032,2890 4032,3038 4012,3058 R2.2@3983,3058 ; v1(3520,1867) v1(4032,1867)
  Bottom w10: v1(3269,2595) 3284,2580 3441,2418 3441,2378 3358,2295 3358,2029 v1(3520,1867) ; v1(4032,1867) 4071,1867 4150,1788 4284,1788 X1.47@4297,1801
BEACON_-FAULT: R42.1 R43.1 X1.30 | length 3109.1
  Top w10: R42.1@1985,3016 1985,2937 1985,2916 1990,2910 2110,2910 2130,2890 2130,2490 2200,2420 3185,2420 3454,2690 4160,2690 4220,2750 4347,2750 X1.30@4397,2701
BEACON_-FAULT_IN: R42.2 U17.22 | length 150.2
  Top w10: U17.22@1983,3225 1983,3077 R42.2@1985,3076
BEACON_OFF: R28.1 X1.24 | length 257.1
  Bottom w10: R28.1@4180,2905 4184,2910 4229,2910 4273,2954 4332,2954 4379,3001 X1.24@4397,3001
BEACON_OFF_OUT: R28.2 U17.38 | length 2373.1
  Top w10: U17.38@2261,3404 2632,3404 2637,3404 2654,3387 2654,3254 2816,3092 2875,3033 v3(3092,3033)
  Bottom w10: v3(3092,3033) 3171,3033 3186,3018 3186,2856 3269,2772 3875,2772 3953,2851 3953,2890 3968,2905 R28.2@4121,2905
BEACON_SCL: U14.7 X1.37 | length 426.9
  Top w10: U14.7@3947,2454 4167,2454 4240,2380 4240,2357 X1.37@4297,2301
BEACON_SDA: U14.6 X1.39 | length 486.7
  Top w10: U14.6@3947,2428 4113,2428 4240,2300 4240,2230 4270,2200 4297,2200 X1.39@4297,2201
BUS_CS: R4.2 X1.27 | length 776.6
  Top w10: R4.2@3983,3151 4165,3151 4189,3126 4189,2812 v1(4150,2772)
  Bottom w10: v1(4150,2772) 4268,2772 X1.27@4297,2801 ; X1.27@4297,2801 4308,2812 X1.27@4297,2801
COMMS_-FAULT: R32.1 R34.1 X1.32 | length 3230.7
  Top w10: R34.1@1926,2937 R34.1@1927,2939 ; R32.1@1927,3016 R34.1@1927,2939 ; v1(4190,2670) 3474,2670 3195,2390 2180,2390 2110,2460 2110,2770 2080,2800 1920,2800 1890,2830 1890,2900 1900,2910 1920,2910 1927,2917 R34.1@1927,2939
  Bottom w10: v1(4190,2670) 4240,2670 4260,2650 4347,2650 X1.32@4397,2601
COMMS_-FAULT_IN: R32.2 U17.21 | length 163.9
  Top w10: R32.2@1927,3076 1930,3079 1930,3120 1963,3153 U17.21@1963,3225
COMMS_OFF: R26.1 X1.25 | length 137.7
  Bottom w10: R26.1@4180,2851 4214,2851 4253,2890 4286,2890 X1.25@4297,2901
COMMS_OFF_OUT: R26.2 U17.37 | length 2327.8
  Top w10: U17.37@2261,3385 2617,3385 2634,3368 2634,3240 2807,3067 2866,3008 v3(3058,3008)
  Bottom w10: v3(3058,3008) 3151,3008 3166,2994 3166,2846 3259,2752 3889,2752 3973,2836 3973,2841 3983,2851 R26.2@4121,2851
COMMS_SCL: U14.5 X1.41 | length 541.4
  Top w10: U14.5@3947,2403 4088,2403 4190,2300 4190,2200 4290,2100 4300,2100 4300,2101 X1.41@4297,2101
COMMS_SDA: U14.4 X1.43 | length 589.5
  Top w10: U14.4@3947,2377 4064,2377 4160,2280 4160,2137 X1.43@4297,2001
DE: R35.2 U13.3 U17.48 | length 1030.7
  Top w10: U17.48@2261,3601 2421,3601 v1(2450,3630)
  Bottom w10: v1(2450,3630) 2450,3850 2630,4030 2800,4030 2820,4010 2820,3980 2812,3989 R35.2@2812,3993 2826,4007 U13.3@2826,4098
GND: BAT1.N C1.2 C2.2 C3.2 C4.2 C5.2 C6.2 C7.2 C8.2 C9.2 C10.2 C11.2 C12.2 C13.1 C14.1 C15.2 C16.2 C17.2 C18.2 C19.2 C20.2 C21.1 C22.2 C23.2 C24.2 C25.2 C26.2 C27.2 C28.2 C29.P$2 C30.P$2 C31.2 C32.2 C33.2 C34.2 C35.2 C36.2 C37.2 C38.2 C39.2 C40.2 JP1.1 LED1.C R10.1 R12.1 R14.1 R16.1 R27.2 R35.1 R45.2 R49.2 R74.1 R75.2 R76.1 TR1.2 U1.11 U2.3 U2.14 U3.11 U4.2 U5.3 U5.9 U5.10 U5.11 U5.12 U5.14 U6.11 U7.5 U7.6 U7.7 U7.8 U7.9 U7.10 U7.11 U7.12 U7.13 U8.1 U8.2 U8.3 U8.4 U8.7 U9.P$2 U10.2 U10.3 U10.7 U10.10 U10.11 U10.12 U10.13 U11.2 U11.3 U11.4 U11.7 U12.2 U12.5 U13.5 U14.1 U14.2 U14.12 U14.21 U15.2 U15.11 U15.12 U15.13 U15.14 U16.P$2 U17.11 U17.53 U17.62 U17.63 U18.2 U19.1 U19.2 U20.4 U21.1 X1.1 X1.2 X1.51 X1.52 X2.4 X3.3 X6.9 | length 6132.5
  Top w10: U4.2@1426,3748 1473,3748 1490,3730 1490,3669 C14.1@1505,3655 ; U15.13@1519,2529 U15.14@1545,2529 ; U15.12@1519,2757 1545,2757 1540,2753 1540,2730 1560,2700 1770,2700 1775,2715 U15.2@1775,2757 ; U17.11@1804,3404 1904,3404 v1(1910,3410) ; U17.63@1904,3682 1904,3627 1910,3620 1920,3620 1924,3624 U17.62@1924,3682 ; U17.53@2101,3682 2103,3684 2103,3756 2142,3796 2151,3805 v2(2195,3805) ; U2.14@2929,3440 2891,3440 2880,3430 2880,3370 2890,3360 3265,3360 v2(3270,3365) ; U2.3@3163,3440 3191,3440 3200,3445 3250,3445 3270,3425 v2(3270,3365) ; v2@3270,3360 v2(3270,3365) ; U16.P$2@3393,4550 U16.P$2@3397,4545 ; U1.11@3432,2934 3432,2994 3435,3000 v1(3440,3002) ; U14.21@3718,2377 3779,2377 3788,2368 ; U14.1@3947,2300 3947,2326 3946,2325 3830,2325 3788,2368 ; U14.12@3947,2582 3939,2582 3910,2610 3860,2610 3830,2580 3830,2410 3788,2368
  Top w12: C17.2@2812,3816 2812,3822 2850,3860 U5.10@2931,3859.98 ; U5.14@2931,3757 2977,3757 2990,3770 3085,3770 3099,3757 U5.3@3165,3757 ; U5.12@2931,3809 2931,3810 2930,3810 2931,3811 2931,3834 U5.10@2931,3859.98 ; U5.9@2931,3885 U5.10@2931,3859.98 ; X2.4@2999,4550 3000,4550 X2.4@3001,4550 ; U6.11@3424,3683 3424,3734 v1(3430,3745) ; U3.11@3429,3328 3429,3389 v1(3430,3390)
  Top w16: 1355,3245 1355,3264 LED1.C@1429,3264 ; U12.2@2238,1459 U12.5@2238,1561 ; C19.2@2408,1483 2420,1480 2420,1420 2433,1408 2481,1372 2531,1372 2581,1372 2631,1372 2698,1408 ; C24.2@2723,1483 2720,1480 2720,1430 2698,1408 ; U11.4@2931,1408 2881,1408 2831,1408 2831,1361 2800,1330 2730,1330 2720,1340 2720,1385 2698,1408 ; U7.13@3172,1703 U7.12@3222,1703 U7.11@3272,1703 U7.10@3322,1703 U7.9@3372,1703 U7.8@3372,1317 U7.7@3322,1317 U7.6@3272,1317 U7.5@3222,1317 ; v2(3720,2180) 3720,2170 3806,2095 C28.2@3806,2104
  Top w24: C23.2@2572,2899 2580,2897 2667,2897 U10.3@2667,2847 ; U10.7@2667,2647 U10.10@3035,2647 ; C12.2@2723,3564 2727,3560 2772,3560 2769,3562 v2(2766,3562) ; C21.1@3115,2651 3111,2647 U10.10@3035,2647 ; C22.2@3125,2786 3113,2797 U10.13@3035,2797 U10.12@3035,2747 U10.11@3035,2697 U10.10@3035,2647 ; U21.1@3344,4173 3344,4210 3363,4229 ; C40.2@3494,4223 3500,4229 3520,4229 3513,4236 C40.2@3510,4236
  Bottom w10: v1(1910,3410) 1978,3410 C33.2@1985,3417
  Bottom w12: C9.2@2857,3517 2858,3517 C9.2@2870,3530 ; 2870,3890 2873,3888 C15.2@2873,3848 ; v1(3430,3390) 3440,3390 3460,3410 3460,3440 C11.2@3458,3439 ; v1(3430,3745) 3430,3760 3445,3775 3445,3801 C16.2@3445,3802
  other v2: 2405,1601 2405,1646 3227,1780 3270,1780 3310,1780 3270,1821 3232,1865 1455,2515 1455,2565 3800,2620 3970,2620 2770,2647 2820,2647 2770,2692 2820,2692 2326,2717 1455,2725 1455,2775 3710,2970 2480,3017 3710,3063 3710,3157 3710,3245 3710,3325 1275,3365 1455,3400 3710,3405 2115,3415 2165,3415 2115,3465 2165,3465 3710,3480 1455,3500 1275,3505 3710,3560 3710,3680 1655,3735 1705,3735 3710,3760 1655,3785 1705,3785 3020,3800 3060,3800 3710,3835 3710,3920 3767,4341 3817,4341 3867,4341 3917,4341 2778,4372 3767,4391 3817,4391 3867,4391 3917,4391
GYRO_-CS: U10.4 U17.44 | length 1166.4
  Top w10: U17.44@2261,3523 2263,3520 2480,3520 v1(2496,3531) ; v1(2455,3251) 2733,2974 2733,2812 2718,2797 U10.4@2667,2797
  Bottom w10: v1(2455,3251) 2497,3292 2497,3520 2500,3524 v1(2496,3531)